# Altium PCB PCB-00001-A-01.PcbDoc (part 3 of 3)
Units mm, origin at the board's own origin, x right, y up, seen from the top; angles counter-clockwise.
Board outline 139.7 x 78.23 mm, 4 copper layers (Top Layer, GND, PWR, Bottom Layer), stack 1.58 mm thick; 84 components, 52 nets, 278 pads, 148 vias.
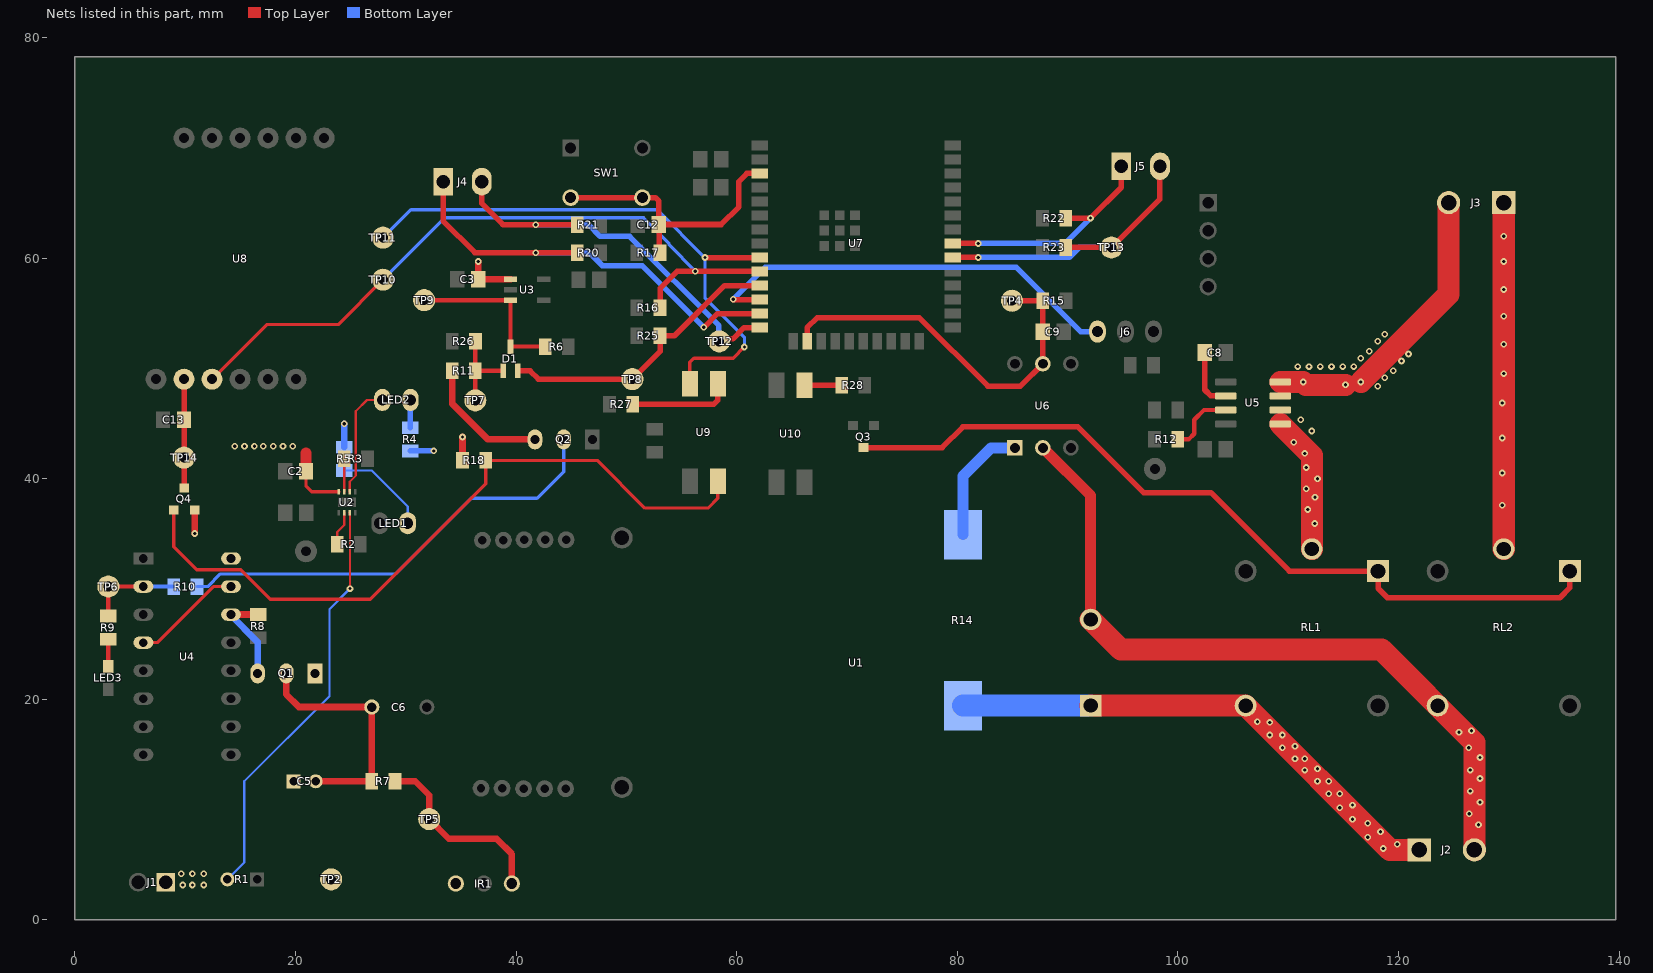
[diagram p4: the nets of this part, all layers, seen from the top]

## Via types
v1: diameter 0.6, hole 0.3, Top Layer to Bottom Layer, 140 vias
v2: diameter 0.6, hole 0.3, Top Layer to Bottom Layer, tented top, 7 vias
v3: diameter 0.6, hole 0.3, Top Layer to Bottom Layer, tented both sides, 1 vias

## Nets (pads, with @x,y where several pads share a name; then routed paths per layer and width w, separated by ;. In a path a pad name is that pad's centre, name@x,y a point inside that pad or via, vN(x,y) a via of type N, cw(c..) or ccw(c..) an arc to the next point about the centre after c; other vN are vias at no path point) (continued)
LIVE: J2.1 R14.1 RL1.NO U1.1 | length 46.8
  Top Layer w2: U1.1@92.098,19.439 92.109,19.427 RL1.NO@106.141,19.427 119.218,6.35 J2.1@121.873,6.35
  Bottom Layer w2: R14.1@80.518,19.431 80.526,19.439 U1.1@92.098,19.439
  other v1: 118.618,6.477 119.888,6.858 117.221,7.493 118.364,8.001 117.221,8.763 115.824,9.144 114.681,10.16 115.824,10.414 113.665,11.43 114.681,11.43 112.649,12.573 113.665,12.573 111.506,13.589 112.649,13.716 110.617,14.605 111.506,14.605 109.474,15.621 110.617,15.748 108.331,16.764 109.474,16.764 108.331,17.907 107.208,17.978
LIVE_IN: RL1.COM U5.1 U5.2 | length 12.5
  Top Layer w2: U5.1@109.282,44.958 112.141,42.099 RL1.COM@112.141,33.627
  other v1: 112.395,35.941 111.76,37.211 112.423,38.307 111.632,39.088 112.649,40.005 111.633,41.021 111.506,42.291 110.49,43.307 112.141,44.323 111.125,45.339
LIVE_OUT: J3.2 U5.3 U5.4 | length 25.6
  Top Layer w2: U5.4@109.282,48.768 v1(111.351,48.768) 111.605,48.514 v1(115.189,48.514) ; v1(116.586,48.768) 124.54,56.722 J3.2@124.54,65.024
  other v1: 118.11,48.387 118.745,49.149 119.507,49.784 110.871,50.165 111.887,50.165 112.903,50.165 113.919,50.165 114.935,50.165 115.951,50.165 120.269,50.673 116.586,50.927 120.904,51.308 117.348,51.562 118.11,52.451 118.745,53.086
NetC8_1: C8.1 U5.6 | length 5.5
  Top Layer w0.5: C8.1@102.432,51.439 102.432,48.063 102.997,47.498 U5.6@104.332,47.498
NetC12_1: C12.1 R17.1 SW1.3 SW1.4 U7.3 | length 25.2
  Top Layer w0.5: SW1.3@44.958,65.477 SW1.4@51.458,65.477 52.633,65.477 52.942,65.168 C12.1@52.942,63.043 ; R17.1@53.058,60.494 53,60.552 53,62.985 C12.1@52.942,63.043 ; U7.3@62.09,67.668 60.937,67.668 60.198,66.929 60.198,64.643 58.598,63.043 C12.1@52.942,63.043
NetIR1_1: IR1.1 R7.2 TP5. | length 17.3
  Top Layer w0.6: R7.2@29.024,12.573 30.861,12.573 32.131,11.303 TP5.@32.131,9.144 33.909,7.366 38.227,7.366 39.624,5.969 IR1.1@39.624,3.302
NetLED1_2: LED1.1 R5.1 | length 8.6
  Bottom Layer w0.2: R5.1@24.426,40.749 26.915,40.749 30.179,37.485 LED1.1@30.179,35.961
NetLED2_2: LED2.1 R4.1 | length 2.5
  Bottom Layer w0.5: R4.1@30.433,44.617 LED2.1@30.433,47.137
NetLED3_2: LED3.2 R9.1 | length 2.5
  Top Layer w0.4: LED3.2@3.048,22.987 R9.1@3.048,25.459
NetQ2_2: Q2.2 R10.1 | length 40.5
  Bottom Layer w0.3: R10.1@11.083,30.226 12.065,30.226 13.208,31.369 29.083,31.369 35.941,38.227 41.91,38.227 44.323,40.64 Q2.2@44.323,43.561
NetQ2_3: Q2.3 R11.2 | length 11.8
  Top Layer w0.6: R11.2@34.21,49.771 34.21,46.816 37.465,43.561 Q2.3@41.723,43.561
NetR1_2: R1.2 U2.3 | length 37.8
  Top Layer w0.2: U2.3@24.926,36.916 24.951,36.891 v1(24.951,30.04)
  Bottom Layer w0.2: R1.2@13.843,3.683 15.367,5.207 15.367,12.573 23.105,20.311 23.105,28.194 v1(24.951,30.04)
NetR2_2: R2.2 U2.2 | length 3.1
  Top Layer w0.2: R2.2@23.795,34.056 23.795,35.165 24.426,35.796 U2.2@24.426,36.916
NetR3_2: R3.2 U2.7 | length 3
  Top Layer w0.2: U2.7@24.426,38.816 24.426,41.799 R3.2@24.43,41.803
NetR12_1: R12.1 U5.7 | length 6.2
  Top Layer w0.4: R12.1@99.983,43.561 100.965,43.561 101.473,44.069 101.473,45.339 102.362,46.228 U5.7@104.332,46.228
NetR14_2: R14.2 U6.1 | length 11.1
  Bottom Layer w1: R14.2@80.518,34.925 80.518,40.259 83.058,42.799 U6.1@85.217,42.799
NetR27_1: R27.1 U9.1 | length 9.4
  Top Layer w0.5: R27.1@50.58,46.736 57.912,46.736 58.293,47.117 U9.1@58.293,48.603
NetR28_1: R28.1 U10.1 | length 3.4
  Top Layer w0.5: U10.1@66.167,48.476 R28.1@69.524,48.476
NetU4_4: U4.4 U4.15 | length 9.7
  Top Layer w0.3: U4.4@6.223,25.146 7.493,25.146 12.573,30.226 U4.15@13.843,30.226
NEU: J2.2 RL2.NO U1.2 U6.2 | length 66.5
  Top Layer w1: U6.2@87.757,42.799 92.098,38.458 U1.2@92.098,27.239
  Top Layer w2: U1.2@92.098,27.239 94.825,24.511 118.456,24.511 126.873,16.094 J2.2@126.873,6.35
  other v1: 127.254,8.636 126.401,9.634 127.381,10.668 126.492,11.684 127.381,12.827 126.492,13.589 127.381,14.732 126.365,15.621 125.476,17.018 126.619,17.145
NEU_1: J3.1 RL2.COM | length 31.4
  Top Layer w2: RL2.COM@129.54,33.627 129.54,37.592 129.54,40.513 129.54,43.688 129.54,46.863 v1(129.54,49.53) v1(129.54,52.197) v1(129.54,54.737) v1(129.54,57.15) v1(129.54,59.69) v1(129.54,61.976) J3.1@129.54,65.024
  other v1: 129.413,37.592 129.413,40.513 129.413,43.688 129.413,46.863
P_I: LED2.2 U2.6 | length 10.4
  Top Layer w0.2: U2.6@24.926,38.816 24.926,39.725 25.48,40.279 25.48,46.121 26.496,47.137 LED2.2@27.893,47.137
POWER_SIM: C13.1 Q4.3 TP14. U8.2 | length 9.9
  Top Layer w0.3: C13.1@9.906,45.339 C13.1@9.922,45.323
  Top Layer w0.5: Q4.3@9.906,39.177 TP14.@9.906,41.91 ; C13.1@9.906,45.339 U8.2@9.906,49.022 ; TP14.@9.922,41.91 C13.1@9.922,45.323
Q1: R9.2 R10.2 TP6. U4.2 | length 8.6
  Top Layer w0.4: R9.2@3.048,27.559 TP6.@3.048,30.226 U4.2@6.223,30.226
  Bottom Layer w0.4: U4.2@6.223,30.226 R10.2@8.983,30.226
REG_EN: D1.3 R6.1 TP9. U3.3 | length 15.2
  Top Layer w0.4: TP9.@31.672,56.183 U3.3@39.499,56.183 D1.3@39.499,51.981 R6.1@42.638,51.981
RELAY_LATCH: Q3.3 RL1.A1 RL2.A1 | length 74
  Top Layer w0.5: Q3.3@71.501,42.815 78.629,42.815 80.518,44.704 90.932,44.704 96.901,38.735 102.997,38.735 110.109,31.623 118.137,31.623 RL1.A1@118.141,31.627 118.141,30.068 118.999,29.21 134.62,29.21 135.54,30.13 RL2.A1@135.54,31.627
SIG_EN1: D1.1 R11.1 R26.2 TP7. | length 7.9
  Top Layer w0.4: TP7.@36.31,47.103 R11.1@36.31,49.771 ; R26.2@36.31,52.439 R11.1@36.31,49.771 ; D1.1@38.849,49.771 R11.1@36.31,49.771
SIG_EN2: D1.2 R25.2 TP8. U7.11 | length 26.6
  Top Layer w0.5: D1.2@40.149,49.771 41.288,49.771 42.037,49.022 TP8.@50.546,49.022 53.065,51.541 53.065,52.959 54.356,52.959 58.905,57.508 U7.11@62.09,57.508
SIG_IR1: C5.2 C6.1 Q1.2 R7.1 | length 21.9
  Top Layer w0.6: Q1.2@19.177,22.352 19.177,20.447 20.32,19.304 C6.1@26.924,19.304 R7.1@26.924,12.573 C5.2@21.844,12.573
SIG_IR_OUT: Q1.3 R8.2 U4.14 | length 9.1
  Top Layer w0.6: U4.14@14.163,27.686 R8.2@16.637,27.686
  Bottom Layer w0.6: U4.14@13.843,27.686 14.095,27.686 16.577,25.204 Q1.3@16.577,22.352
SIM_EN: TP11. U7.9 U9.2 | length 54.1
  Top Layer w0.3: U9.2@55.753,48.603 55.753,50.546 56.134,50.927 59.69,50.927 v1(60.706,51.943)
  Top Layer w0.5: v1(57.127,60.048) U7.9@62.09,60.048
  Bottom Layer w0.3: TP11.@27.94,61.849 30.48,64.389 52.786,64.389 v1(57.127,60.048) 57.127,56.411 60.706,52.832 v1(60.706,51.943)
SIM_EN1: Q4.1 R18.1 U9.4 | length 64.8
  Top Layer w0.3: Q4.1@8.972,37.161 8.972,33.827 11.049,31.75 15.05,31.75 17.716,29.083 26.797,29.083 37.245,39.531 R18.1@37.245,41.656 47.374,41.656 51.692,37.338 57.404,37.338 58.293,38.227 U9.4@58.293,39.789
SIM_RST: R16.1 TP10. U7.10 U8.3 | length 63.4
  Top Layer w0.3: U8.3@12.446,49.022 17.399,53.975 23.876,53.975 TP10.@27.94,58.039
  Top Layer w0.5: R16.1@53.054,55.495 53.054,57.245 54.61,58.801 v1(56.261,58.801) 56.272,58.79 62.079,58.79 U7.10@62.09,58.778
  Bottom Layer w0.3: TP10.@27.94,58.039 33.544,63.643 51.546,63.643 53.875,61.314 53.875,61.187 v1(56.261,58.801)
TAMP_1_HIGH: J4.1 R20.1 U7.13 | length 40.5
  Top Layer w0.5: J4.1@33.401,66.929 33.401,63.373 36.28,60.494 R20.1@45.556,60.494 ; v1(57.023,53.721) 58.27,54.968 U7.13@62.09,54.968
  Bottom Layer w0.5: v1(41.783,60.495) 45.555,60.495 45.556,60.494 46.633,60.494 47.818,59.309 51.435,59.309 v1(57.023,53.721)
TAMP_1_LOW: J4.2 R21.2 TP12. U7.14 | length 37.5
  Top Layer w0.5: J4.2@36.901,66.929 36.901,64.953 38.82,63.034 v1(41.783,63.034) R21.2@45.556,63.034 ; TP12.@58.42,52.451 58.649,52.68 59.665,52.68 60.683,53.698 U7.14@62.09,53.698
  Bottom Layer w0.5: v1(41.783,63.034) 46.567,63.034 47.625,61.976 50.292,61.976 58.381,53.887 58.381,52.49 TP12.@58.42,52.451
TAMP_2_HIGH: J5.1 R22.1 U7.31 | length 21.5
  Top Layer w0.5: U7.31@79.597,61.324 v1(81.898,61.324) ; R22.1@89.823,63.627 v1(92.075,63.627) 94.869,66.421 J5.1@94.869,68.326
  Bottom Layer w0.5: v1(81.898,61.324) 89.772,61.324 v1(92.075,63.627)
TAMP_2_LOW: J5.2 R23.2 TP13. U7.30 | length 28.1
  Top Layer w0.5: U7.30@79.597,60.054 v1(81.898,60.054) ; R23.2@89.823,60.96 TP13.@93.98,60.96 98.369,65.349 J5.2@98.369,68.326
  Bottom Layer w0.5: v1(81.898,60.054) 90.153,60.054 91.059,60.96 TP13.@93.98,60.96
TOUCH_DET: J6.3 U7.12 | length 39.1
  Top Layer w0.5: v1(59.69,56.261) 59.713,56.238 U7.12@62.09,56.238
  Bottom Layer w0.5: v1(59.69,56.261) 62.611,59.182 85.344,59.182 91.186,53.34 J6.3@92.71,53.34
V_SIG: C9.1 R15.1 TP4. U6.5 U7.16 | length 34.9
  Top Layer w0.5: U7.16@66.396,52.447 66.396,53.696 67.31,54.61 76.542,54.61 82.765,48.387 85.725,48.387 U6.5@87.757,50.419 C9.1@87.757,53.34 R15.1@87.757,56.134 TP4.@84.963,56.134
VSYS: C2.1 C3.1 C5.1 IR1.3 J1.1 Q1.1 Q4.2 R4.2 R5.2 R18.2 TP2. U2.8 U3.1 U4.16 | length 19.2
  Top Layer w0.3: C2.1@20.969,40.66 20.969,39.329 21.482,38.816 U2.8@23.926,38.816
  Top Layer w0.6: v1(10.872,35.031) Q4.2@10.872,37.161 ; R18.2@35.145,41.656 v1(35.145,43.781) ; v1(36.576,59.69) C3.1@36.576,58.083 U3.1@39.499,58.083
  Top Layer w1: C2.1@20.969,40.66 20.969,42.311
  Bottom Layer w0.5: R4.2@30.433,42.517 v1(32.533,42.517)
  Bottom Layer w0.6: R5.2@24.426,42.849 v1(24.426,44.993)
  other v1: 14.504,42.95 15.393,42.95 16.286,42.943 17.093,42.953 17.982,42.953 18.876,42.946 19.765,42.946
  other v2: 9.779,3.175 10.668,3.175 11.684,3.175 9.652,4.191 10.668,4.191 11.684,4.191
pads on no net: RL1.NC RL2.NC U3.4 U4.1 U4.3 U4.5 U4.6 U4.7 U4.9 U4.10 U4.11 U4.12 U6.3 U6.6 U7.4 U7.5 U7.6 U7.7 U7.15 U7.17 U7.18 U7.19 U7.20 U7.21 U7.22 U7.24 U7.26 U7.29 U7.32 U7.33 U7.36 U7.37 U8.1 U8.7 U8.8 U8.9 U8.10 U8.11 U8.12

## Polygon pours and split planes (outlines as drawn)
DGND on Bottom Layer "PolygonGND_BOT" (solid, remove dead copper, pour order 1): 0.635,0 70.485,0 70.485,39.878 66.421,43.942 66.421,45.085 77.343,45.085 78.359,46.101 90.678,46.101 90.678,45.974 99.568,37.084 103.124,37.084 105.537,39.497 105.283,39.751 105.283,77.851 105.181,77.953 80.099,77.953 80.099,71.539 80.137,71.501 61.468,71.501 61.468,77.838 61.354,77.724 0.635,77.724
DGND on Top Layer "PolygonGND" (solid, remove dead copper, pour order 0): 0.635,0 70.485,0 70.485,39.878 66.421,43.942 66.421,45.085 77.343,45.085 78.359,46.101 90.678,46.101 90.678,45.974 99.568,37.084 103.124,37.084 105.537,39.497 105.283,39.751 105.283,77.851 105.181,77.953 80.099,77.953 80.099,71.539 80.137,71.501 61.468,71.501 61.468,77.838 61.354,77.724 0.635,77.724
LIVE_OUT on PWR (split plane): 126.048,68.242 126.048,54.694 118.584,47.23 112.33,47.23 112.165,47.395 112.075,47.472 111.975,47.533 111.865,47.578 111.751,47.606 111.633,47.615 111.515,47.606 111.506,47.604 111.497,47.606 111.379,47.615 108.063,47.615 108.063,50.004 109,50.941 112.649,50.941 112.78,50.949 112.908,50.975 113.033,51.017 113.15,51.075 113.259,51.148 113.358,51.234 122.502,60.378 122.588,60.477 122.661,60.586 122.719,60.703 122.761,60.828 122.787,60.956 122.795,61.087 122.795,67.784 123.986,68.975 125.315,68.975
NEU_1 on PWR (split plane): 133.237,66.133 133.237,34.832 130.268,31.863 128.685,31.863 126.732,33.816 126.732,52.544 127.709,53.52 127.795,53.619 127.868,53.728 127.926,53.845 127.968,53.97 127.994,54.098 128.002,54.229 127.994,54.36 127.968,54.488 127.952,54.535 127.952,68.401 127.968,68.448 127.994,68.576 127.998,68.641 128.078,68.721 130.649,68.721
no net on PWR (split plane): 106.753,51.529 106.753,51.689 106.914,51.689
NEU on PWR (split plane): 129.3,20.286 129.3,4.352 128.236,3.288 126.907,3.288 125.208,4.987 125.208,7.239 125.208,13.335 125.2,13.466 125.174,13.594 125.132,13.719 125.074,13.836 125.001,13.945 124.915,14.044 121.779,17.179 121.779,18.528 121.92,18.669 121.92,21.477 128.109,21.477
no net on PWR (split plane): 131.191,3.048 131.011,3.228 131.097,3.327 131.17,3.436 131.191,3.479
LIVE_IN on PWR (split plane): 111.35,45.828 111.4,45.727 111.473,45.618 111.559,45.519 111.658,45.433 111.699,45.405 111.727,45.364 111.813,45.265 113.425,43.654 113.425,33.401 113.425,31.911 113.377,31.863 111.667,31.863 110.73,32.8 110.73,41.021 110.722,41.152 110.696,41.28 110.654,41.405 110.596,41.522 110.523,41.631 110.437,41.73 108.063,44.103 108.063,46.111 111.067,46.111
3V3VDC on PWR (split plane): 105.249,45.576 101.574,49.25 101.498,49.313 101.411,49.359 101.317,49.388 101.219,49.397 58.039,49.397 57.941,49.388 57.847,49.359 57.76,49.313 57.684,49.25 48.941,40.507 40.38,40.507 40.38,77.722 59.563,77.722 59.563,71.539 82.042,71.539 82.042,77.721 82.009,77.722 105.249,77.722
5V on PWR (split plane): 105.249,44.155 105.249,44.113 105.258,43.995 105.285,43.881 105.331,43.771 105.392,43.671 105.469,43.581 105.543,43.518 105.543,39.451 103.17,37.078 99.649,37.078 90.779,45.948 90.703,46.011 90.616,46.057 90.522,46.086 90.424,46.095 78.486,46.095 78.388,46.086 78.294,46.057 78.207,46.011 78.131,45.948 77.389,45.206 67.971,45.206 67.765,45.413 67.666,45.499 67.557,45.572 67.44,45.63 67.315,45.672 67.187,45.698 67.056,45.706 66.925,45.698 66.797,45.672 66.672,45.63 66.555,45.572 66.446,45.499 66.347,45.413 66.261,45.314 66.188,45.205 66.13,45.088 66.088,44.963 66.062,44.835 66.054,44.704 66.062,44.573 66.088,44.446 53.513,31.871 35.433,31.871 35.335,31.862 35.241,31.833 35.154,31.787 35.078,31.724 32.919,29.565 32.856,29.489 32.81,29.402 32.781,29.308 32.772,29.21 32.772,26.283 21.417,26.283 17.012,30.688 17.012,38.146 18.369,39.503 49.149,39.503 49.247,39.512 49.341,39.541 49.428,39.587 49.504,39.65 58.247,48.393 101.011,48.393
no net on PWR (split plane): 51.689,14.859 51.689,14.808 51.257,15.24 51.308,15.24
LIVE on PWR (split plane): 119.56,9.324 119.659,9.238 119.768,9.165 119.885,9.107 120.01,9.065 120.138,9.039 120.269,9.031 122.394,9.031 123.204,8.221 123.204,7.239 123.204,4.987 122.14,3.923 118.271,3.923 103.999,18.195 103.999,20.667 104.301,20.969 107.916,20.969
VSYS on PWR (split plane): 39.376,40.507 18.161,40.507 18.063,40.498 17.969,40.469 17.882,40.423 17.806,40.36 16.155,38.709 16.092,38.633 16.046,38.546 16.017,38.452 16.008,38.354 16.008,30.48 16.017,30.382 16.046,30.288 16.092,30.201 16.155,30.125 20.854,25.426 20.93,25.363 21.017,25.317 21.111,25.288 21.209,25.279 33.066,25.279 35.078,23.267 43.714,14.631 43.79,14.568 43.877,14.522 43.971,14.493 44.069,14.484 50.592,14.484 51.06,14.016 51.06,0.51 0.51,0.51 0.51,77.722 39.376,77.722
DGND on GND (split plane): 115.068,35.046 115.062,35.046 114.964,35.037 114.87,35.008 114.805,34.974 114.808,35.052
DGND on GND (split plane): 106.807,77.597 106.503,77.293 106.503,77.722 106.682,77.722
DGND on GND (split plane): 109.347,39.624 109.347,31.49 109.341,31.49 109.341,39.243 109.332,39.341 109.303,39.435 109.257,39.522 109.194,39.598 109.152,39.633
DGND on GND (split plane): 106.676,39.745 106.503,39.745 106.503,39.753
DGND on GND (split plane): 105.499,39.287 105.508,39.189 105.537,39.095 105.583,39.008 105.646,38.932 105.69,38.888 105.766,38.825 105.853,38.779 105.947,38.75 106.045,38.741 108.337,38.741 108.337,30.988 108.346,30.89 108.375,30.796 108.421,30.709 108.484,30.633 108.56,30.57 108.647,30.524 108.741,30.495 108.839,30.486 115.062,30.486 115.16,30.495 115.254,30.524 115.341,30.57 115.417,30.633 115.48,30.709 115.526,30.796 115.555,30.89 115.564,30.988 115.564,34.042 125.736,34.042 125.736,29.196 101.38,29.196 95.617,34.959 95.617,44.958 95.609,45.089 95.583,45.217 95.541,45.342 95.483,45.459 95.41,45.568 95.324,45.667 95.225,45.753 95.116,45.826 94.999,45.884 94.874,45.926 94.746,45.952 94.615,45.96 94.484,45.952 94.356,45.926 94.231,45.884 94.114,45.826 94.005,45.753 93.906,45.667 93.819,45.579 71.501,45.579 71.37,45.571 71.242,45.545 71.117,45.503 71,45.445 70.891,45.372 70.792,45.286 70.706,45.187 70.633,45.078 70.575,44.961 70.533,44.836 70.507,44.708 70.499,44.577 70.499,43.067 70.358,42.926 70.499,42.785 70.499,40.005 70.499,0.51 0.51,0.51 0.51,77.722 59.563,77.722 59.563,71.539 82.042,71.539 82.042,77.721 82.009,77.722 105.499,77.722

## Keep-outs
Keep-Out Layer:
  the board outline again, w1

## Other copper
Top Layer:
  rectangle net VSYS: 8.509,2.159 12.319,4.826
  region net 3V3VDC: 44.831,58.928 44.831,53.594 46.355,53.594 46.355,58.928
  region net DGND: 51.226,9.364 51.226,14.571 35.433,14.571 35.433,9.364
  region net 5V: 51.398,31.93 51.398,37.137 35.814,37.137 35.814,31.93
  rectangle net 3V3VDC: 41.896,57.289 45.212,58.801
  pour cut-out: 106.807,77.597 106.553,77.343 106.553,38.989 103.632,36.068 99.187,36.068 90.17,45.085 78.613,45.085 77.216,43.688 71.12,43.688 70.358,42.926 72.517,40.767 72.517,0.508 139.065,0.508 139.319,0.762 139.319,77.724 106.68,77.724
  region net VSYS: 24.087,39.263 21.797,39.263 21.619,39.441 21.619,39.946 20.32,39.946 20.319,39.945 20.319,39.09 20.838,38.571 24.082,38.571
  region net VSYS: 21.468,42.271 21.468,42.894 20.781,43.581 13.923,43.581 13.923,42.311 20.074,42.311 20.469,41.916 21.468,41.916
  pour cut-out: 59.563,77.841 59.563,71.501 82.042,71.501 82.042,77.683
  region net LIVE_OUT: 108.331,47.244 117.475,47.244 121.158,50.927 121.158,53.34 118.364,53.34 115.697,50.673 108.331,50.673
  region net LIVE_IN: 108.331,44.831 108.331,46.482 108.33,46.483 108.33,46.538 110.561,46.538 113.157,43.942 113.157,41.783
  region net 5V: 20.918,37.678 21.807,37.678 22.326,37.159 24.056,37.159 24.056,36.322 21.972,36.322 21.741,36.091 21.46,36.091
  region net NetR2_2: 23.229,34.696 23.229,35.159 24.426,36.356 24.426,35.796 24.21,35.58 24.21,34.945 24.337,34.818 24.337,34.691
  region net NetR3_2: 23.867,41.203 25.004,41.203 25.004,41.054 24.718,40.768 24.718,40.12 24.527,39.929 24.526,39.929 24.327,39.929 24.122,40.133 24.117,40.133 24.117,40.794 23.854,41.058 23.855,41.059 23.855,41.199 23.855,41.203
Bottom Layer:
  rectangle net VSYS: 8.509,2.159 12.319,4.826
  pour cut-out: 106.807,77.597 106.553,77.343 106.553,38.989 103.632,36.068 99.187,36.068 90.17,45.085 78.613,45.085 77.216,43.688 71.12,43.688 70.358,42.926 72.517,40.767 72.517,0.508 139.065,0.508 139.319,0.762 139.319,77.724 106.68,77.724
  pour cut-out: 50.935,35.37 50.935,33.973 50.236,33.274 48.966,33.274 48.268,33.973 48.268,35.37 48.966,36.068 50.236,36.068
  pour cut-out: 59.563,77.841 59.563,71.501 82.042,71.501 82.042,77.683
  pour cut-out: 48.895,13.335 50.292,13.335 50.99,12.636 50.99,11.367 50.292,10.668 48.895,10.668 48.196,11.367 48.196,12.636
GND (plane layer: these items are gaps in the copper):
  pour cut-out: 59.563,77.879 59.563,71.539 82.042,71.539 82.042,77.721
  pour cut-out: 106.807,77.597 106.299,77.089 106.299,39.763 109.347,39.624 109.347,31.369 114.681,31.369 114.808,35.052 126.619,34.798 126.746,27.432 100.319,27.432 97.78,29.971 93.726,34.163 93.726,44.577 92.937,45.235 78.725,45.197 77.216,43.688 71.12,43.688 70.358,42.926 72.136,41.148 72.136,0.508 139.319,0.508 139.319,77.724 106.68,77.724
  pour cut-out: 48.895,13.335 50.292,13.335 50.99,12.636 50.99,11.367 50.292,10.668 48.895,10.668 48.196,11.367 48.196,12.636
  pour cut-out: 48.966,36.068 50.363,36.068 51.062,35.37 51.062,34.1 50.363,33.401 48.966,33.401 48.268,34.1 48.268,35.37
  lines w1: 71.501,0 0,0 0,78.232 106.001,78.232 106.001,39.287 106.045,39.243 108.839,39.243 108.839,30.988 115.062,30.988 115.062,34.544 126.238,34.544 126.238,28.194
  lines w2: 71.501,0 71.501,40.005 71.501,44.577 94.234,44.577 94.615,44.958 94.615,34.544 100.965,28.194 126.238,28.194
PWR (plane layer: these items are gaps in the copper):
  pour cut-out: 59.563,77.879 59.563,71.539 82.042,71.539 82.042,77.721
  region: 66.421,43.942 53.721,31.242 53.721,30.988 35.306,30.988 33.528,29.21 33.528,25.908 44.323,15.113 44.45,15.24 51.308,15.24 51.689,14.859 51.689,0.508 52.197,0 70.612,0 71.882,1.27 71.882,41.275
  region: 133.223,0.254 133.223,1.016 130.683,3.556 128.905,1.778 126.365,1.778 124.714,3.429 123.063,3.429 122.174,2.54 117.094,2.54 117.094,3.429 103.759,16.764 103.632,16.637 72.517,16.637 71.755,15.875 71.755,0.381
  region: 102.87,16.764 101.727,15.621 71.882,15.621 71.882,40.386 68.326,43.942 68.961,44.577 77.089,44.577 78.105,45.593 90.17,45.593 99.441,36.322 103.251,36.322 106.299,39.37 106.299,43.053 107.823,43.053 109.474,41.402 109.474,32.258 111.887,29.845 112.268,29.845 112.268,22.098 111.633,21.463 110.744,20.955 104.013,22.606 102.362,20.955 102.362,19.812
  region: 114.554,45.72 119.634,45.72 124.968,51.054 124.968,33.274 131.318,26.924 131.318,21.082 130.429,21.082 128.397,23.114 121.92,23.114 121.92,18.669 120.396,17.145 123.952,13.589 123.952,11.303 123.317,10.668 123.19,10.795 119.634,10.795 119.634,11.557 110.744,20.447 110.617,20.447 110.617,28.829 112.014,30.226 114.173,30.226 114.935,30.988 114.935,44.831 112.776,46.99
  region: 120.904,61.595 110.998,51.689 106.553,51.689 106.553,77.597 106.934,77.978 107.061,77.851 139.192,77.851 139.827,77.216 139.827,0.635 139.065,-0.127 133.731,-0.127 131.191,2.413 131.191,7.874 130.937,8.128 130.937,26.67 127.635,29.972 130.937,29.972 133.731,32.766 133.731,34.036 134.747,35.052 134.747,50.165 135.001,50.419 135.001,59.69 133.858,60.833 133.858,68.072 131.953,69.977 122.493,69.977 120.904,68.388 120.904,61.468
  pour cut-out: 48.895,13.335 50.292,13.335 50.99,12.636 50.99,11.367 50.292,10.668 48.895,10.668 48.196,11.367 48.196,12.636
  pour cut-out: 48.966,36.068 50.363,36.068 51.062,35.37 51.062,34.1 50.363,33.401 48.966,33.401 48.268,34.1 48.268,35.37
  lines w1: 39.878,40.005 39.878,78.613 ; 51.562,0 51.562,14.224 50.8,14.986 44.069,14.986 35.433,23.622 33.274,25.781 ; 33.274,25.781 33.274,29.21 35.433,31.369 53.721,31.369 67.056,44.704 77.597,44.704 78.486,45.593 90.424,45.593 99.441,36.576 103.378,36.576 106.045,39.243 106.045,44.069 101.219,48.895 58.039,48.895 49.149,40.005 23.114,40.005 18.161,40.005 16.51,38.354 16.51,30.48 21.209,25.781 33.274,25.781
  lines w1.5: 106.001,44.113 106.001,78.105 ; 107.061,46.482 106.68,46.863 111.379,46.863 112.268,45.974 ; 111.633,46.863 112.268,46.228 ; 125.73,52.959 127,54.229 ; 127,68.707 128.016,69.723
  lines w1.9: 127,54.229 127,68.707
  lines w2: 67.056,44.704 71.501,40.259 71.501,-0.127 ; 112.268,46.228 118.999,46.228 127,54.229 ; 112.522,45.974 114.427,44.069 114.427,33.401 114.427,31.496 113.792,30.861 111.252,30.861 109.728,32.385 109.728,41.021 107.061,43.688 107.061,46.482 107.061,50.419 108.585,51.943 112.649,51.943 121.793,61.087 121.793,68.199 123.571,69.977 125.73,69.977 127,68.707 ; 125.73,52.959 125.73,33.401 128.27,30.861 130.683,30.861 134.239,34.417 134.239,66.548 131.064,69.723 128.016,69.723 ; 124.206,4.572 126.492,2.286 128.651,2.286 130.302,3.937 130.302,20.701 128.524,22.479 121.412,22.479 120.777,21.844 120.777,16.764 124.206,13.335 124.206,7.239 ; 124.206,4.572 122.555,2.921 117.856,2.921 102.997,17.78 102.997,21.082 103.886,21.971 108.331,21.971 120.269,10.033 122.809,10.033 124.206,8.636 124.206,7.239 ; 124.206,4.572 124.206,7.239

## Silkscreen, mask and mechanical layers (free items; w line width, h text height)
Top Overlay:
  drawing of 4 lines, arcs and shapes, not listed
  text "L" at 120.15,70.493 h2 r180
  text "N" at 135.009,70.239 h2 r180
  text "FINNIX" at 72.744,5.053 h2
  text "L" at 113.657,3.04 h2
  text "N" at 132.961,2.786 h2
  text "00001-2-HAR-A-01" at 72.687,2.583 h0.8
Bottom Overlay:
  drawing of 4 lines, arcs and shapes, not listed
  text "L" at 118.229,70.366 h2 r180
  text "N" at 133.723,69.985 h2 r180
  text "+" at 8.679,7.413 h1.5
  text "+" at 10.838,3.984 h1.5
  text "L" at 113.8,2.913 h2
  text "N" at 134.275,2.918 h2
Bottom Courtyard:
  lines w0.2: -56.134,-56.214 -51.134,-56.214 ; -56.134,-6.214 -51.134,-6.214 ; -56.134,43.786 -51.134,43.786 ; -56.134,93.786 -51.134,93.786 ; -56.134,138.786 -51.134,138.786 217.366,138.786 ; -51.134,-61.214 -51.134,-56.214 ; -51.134,-51.714 -15.134,-51.714 80.866,-51.714 ; -51.134,-47.714 -15.134,-47.714 ; -51.134,-43.714 -15.134,-43.714 ; -51.134,-39.714 -15.134,-39.714 80.866,-39.714 80.866,-56.214 ; -51.134,-31.714 -15.134,-31.714 ; -51.134,-23.714 -15.134,-23.714 ; -21.134,-56.214 -21.134,-23.714 ; -15.134,-56.309 -15.134,-23.714 -15.134,-56.214 ; -1.134,-61.214 -1.134,-56.214 ; -1.134,138.786 -1.134,143.786 ; 48.866,-61.214 48.866,-56.214 ; 48.866,138.786 48.866,143.786 ; 97.366,-56.214 97.366,-16.214 217.366,-16.214 ; 98.866,-61.214 98.866,-56.214 ; 98.866,138.786 98.866,143.786 ; 107.366,-56.214 107.366,-16.214 ; 107.366,-48.714 217.366,-48.714 ; 107.366,-41.214 217.366,-41.214 ; 107.366,-33.714 217.366,-33.714 ; 107.366,-26.214 187.366,-26.214 ; 147.366,-56.214 147.366,-33.714 ; 148.866,-61.214 148.866,-56.214 ; 148.866,138.786 148.866,143.786 ; 187.366,-56.214 187.366,-16.214 ; 187.416,-25.489 217.416,-25.489 ; 197.091,-15.789 197.091,-14.789 ; 197.366,-41.214 197.366,-33.714 ; 198.091,-15.789 198.091,-15.289 ; 198.866,-61.214 198.866,-56.214 ; 198.866,138.786 198.866,143.786 ; 201.616,-9.964 211.616,-9.964 211.616,-8.964 ; 203.616,-9.964 203.616,-9.464 ; 204.616,-9.964 204.616,-9.464 ; 205.616,-9.964 205.616,-9.464 ; 206.616,-9.964 206.616,-8.964 ; 207.366,-41.214 207.366,-33.714 ; 207.616,-9.964 207.616,-9.464 ; 208.616,-9.964 208.616,-9.464 ; 209.616,-9.964 209.616,-9.464 ; 210.616,-9.964 210.616,-9.464 ; 217.366,-61.214 217.366,-56.214 ; 217.366,43.786 222.366,43.786 ; 217.366,93.786 222.366,93.786 ; 222.366,-56.214 217.366,-56.214 ; 222.366,138.786 217.366,138.786 ; -56.134,143.786 222.366,143.786 ; -56.134,143.786 -51.134,143.786 -51.134,-56.214 ; -56.134,143.786 -56.134,-61.214 222.366,-61.214 222.366,143.786 ; -51.134,-56.214 217.366,-56.214 ; 217.366,-56.214 217.366,143.786 ; 217.366,138.786 217.366,143.786 ; 217.366,143.786 222.366,143.786 ; 217.366,143.786 222.366,143.786 ; -51.134,-35.714 -15.134,-35.714 -51.134,-35.714 ; -51.134,-27.714 -15.134,-27.714 -51.134,-27.714
  text "A" at -29.634,140.286 h2
  text "B" at 23.366,140.286 h2
  text "D" at 123.366,140.286 h2
  text "E" at 173.366,140.286 h2
  text "F" at 208.616,140.286 h2
  text "C" at 73.366,140.036 h2
  text "4" at -54.4,116.101 h2
  text "4" at 219.1,116.101 h2
  text "3" at -54.134,69.786 h2
  text "3" at 219.366,69.786 h2
  text "2" at -54.134,19.786 h2
  text "2" at 219.366,19.786 h2
  text "0" at 200.866,-12.464 h2
  text "5" at 205.866,-12.464 h2
  text "10" at 210.366,-12.464 h2
  text "mm" at 205.366,-14.964 h2
  text "CLIENT:" at 108.366,-17.714 h0.75
  text "FINNIX" at 188.316,-20.364 h2
  text "LOAN_SCAM_BUSTER" at 109.866,-24.214 h4
  text "Board Outline" at -45.921,-26.404 h1.5
  text "TITLE:" at 108.366,-27.714 h0.75
  text "Keep-Out Layer" at -45.921,-29.948 h1.5
  text "1" at -54.134,-30.214 h2
  text "1" at -54.134,-30.214 h2
  text "1" at 219.366,-30.214 h2
  text "PROTO TEST BOARD" at 109.866,-32.214 h2
  text "Notes" at -45.921,-34.492 h1.5
  text "PAGE SIZE:" at 187.866,-35.464 h0.75
  text "SCALE:" at 197.866,-35.464 h0.75
  text "UNITS:" at 207.866,-35.464 h0.75
  text "DRAWN BY:" at 108.366,-35.714 h0.75
  text "CHECKED BY:" at 148.366,-35.714 h0.75
  text "See review doc:" at 148.266,-38.014 h1.5
  text "Top Overlay" at -45.921,-38.037 h1.5
  text "A4" at 190.616,-39.464 h2
  text "MM" at 210.116,-39.464 h2
  text "Varun" at 109.866,-39.714 h2
  text "RVW-0001-A-01" at 148.366,-40.414 h1.5
  text "NOTES:" at -14.134,-41.014 h0.75
  text "Top Layer" at -45.921,-42.081 h1.5
  text "DATE:" at 108.366,-42.714 h0.75
  text "APPROVED BY:" at 148.366,-42.714 h0.75
  text "RoHS COMPLIANT" at -12.834,-43.414 h1.5
  text "Copyright of" at 188.616,-44.714 h1.5
  text "See review doc:" at 148.266,-45.214 h1.5
  text "Bottom Layer" at -45.921,-46.125 h1.5
  text "For Parts List See Seperate Bill Of Materials" at -12.934,-46.914 h1.5
  text "26/09/2024" at 109.666,-46.914 h2
  text "AEL 2024" at 188.791,-47.214 h1.5
  text "RVW-0001-A-01" at 148.266,-47.714 h1.5
  text "Designed with Altium 2024" at -12.934,-50.114 h1.5
  text "Bottom Overlay" at -45.921,-50.17 h1.5
  text "LAYER:" at 108.366,-50.214 h0.75
  text "DRAWING NUMBER:" at 148.366,-50.214 h0.75
  text "REVISION:" at 188.366,-50.214 h0.75
  text "PCB Layout" at 104.116,-52.214 h3.5 r90
  text "REV 01" at 196.366,-53.964 h2
  text "Multilayer" at -45.921,-54.214 h1.5
  text "See Table" at 109.866,-54.214 h2
  text "PCB-00001-A-01" at 149.866,-54.214 h2
  text "PCB TEMPLATE REVISION: REV01" at -12.834,-55.014 h1.5
  text "A" at -29.634,-59.714 h2
  text "B" at 23.366,-59.714 h2
  text "D" at 123.366,-59.714 h2
  text "E" at 173.366,-59.714 h2
  text "F" at 208.616,-59.714 h2
  text "C" at 73.366,-59.964 h2

## Dimensions
0,0 to 139.7,0 on Bottom Courtyard
0,0 to 0,78.232 on Bottom Courtyard

## Text inside footprints (layer, text, board x,y; h text height)
IR1: Mechanical 13 "TAB" at 37.56,2.419 h0.64 r180
LED1: Top Overlay "+" at 31.959,36.311 h0.8 r180
LED2: Top Overlay "+" at 32.213,47.487 h0.8 r180
SW1: Top Overlay "*" at 44.64,70.853 h1.27; Mechanical 13 "*" at 45.806,69.414 h1.27
U3: Top Overlay "*" at 38.928,58.464 h1.27; Mechanical 13 "*" at 40.039,57.372 h1.27
U7: Top Overlay "*" at 60.388,69.573 h1.27; Mechanical 13 "*" at 63.157,69.573 h1.27
U9: Top Overlay "*" at 59.614,49.174 h1.27 r270; Mechanical 13 "*" at 58.153,47.638 h1.27 r270
U10: Top Overlay "*" at 67.488,49.047 h1.27 r270; Mechanical 13 "*" at 66.027,47.511 h1.27 r270